# Altium PCB MCU_PCB.PcbDoc
Units mm, origin at the board's own origin, x right, y up, seen from the top; angles counter-clockwise.
Board outline 50.04 x 70 mm, 2 copper layers (Top Layer, Bottom Layer); 8 components, 16 nets, 70 pads, 0 vias.
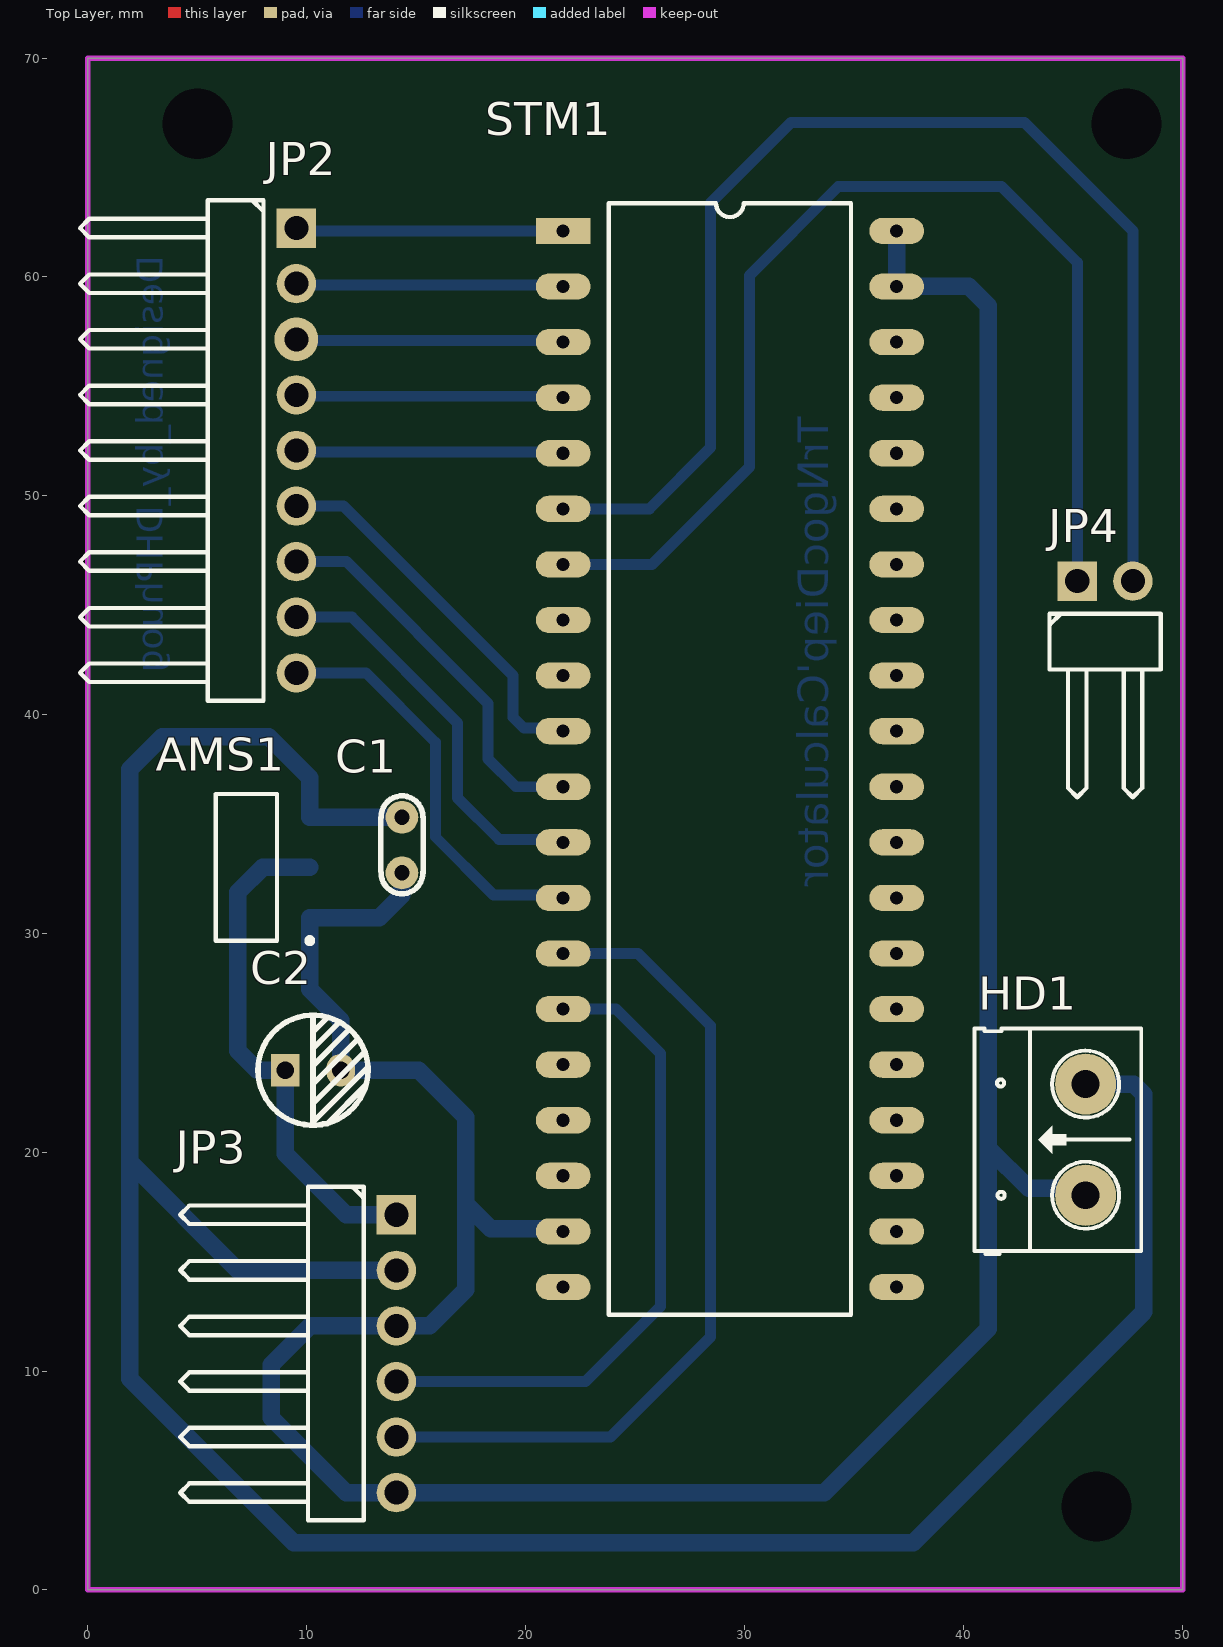
[diagram p0: Top Layer view]
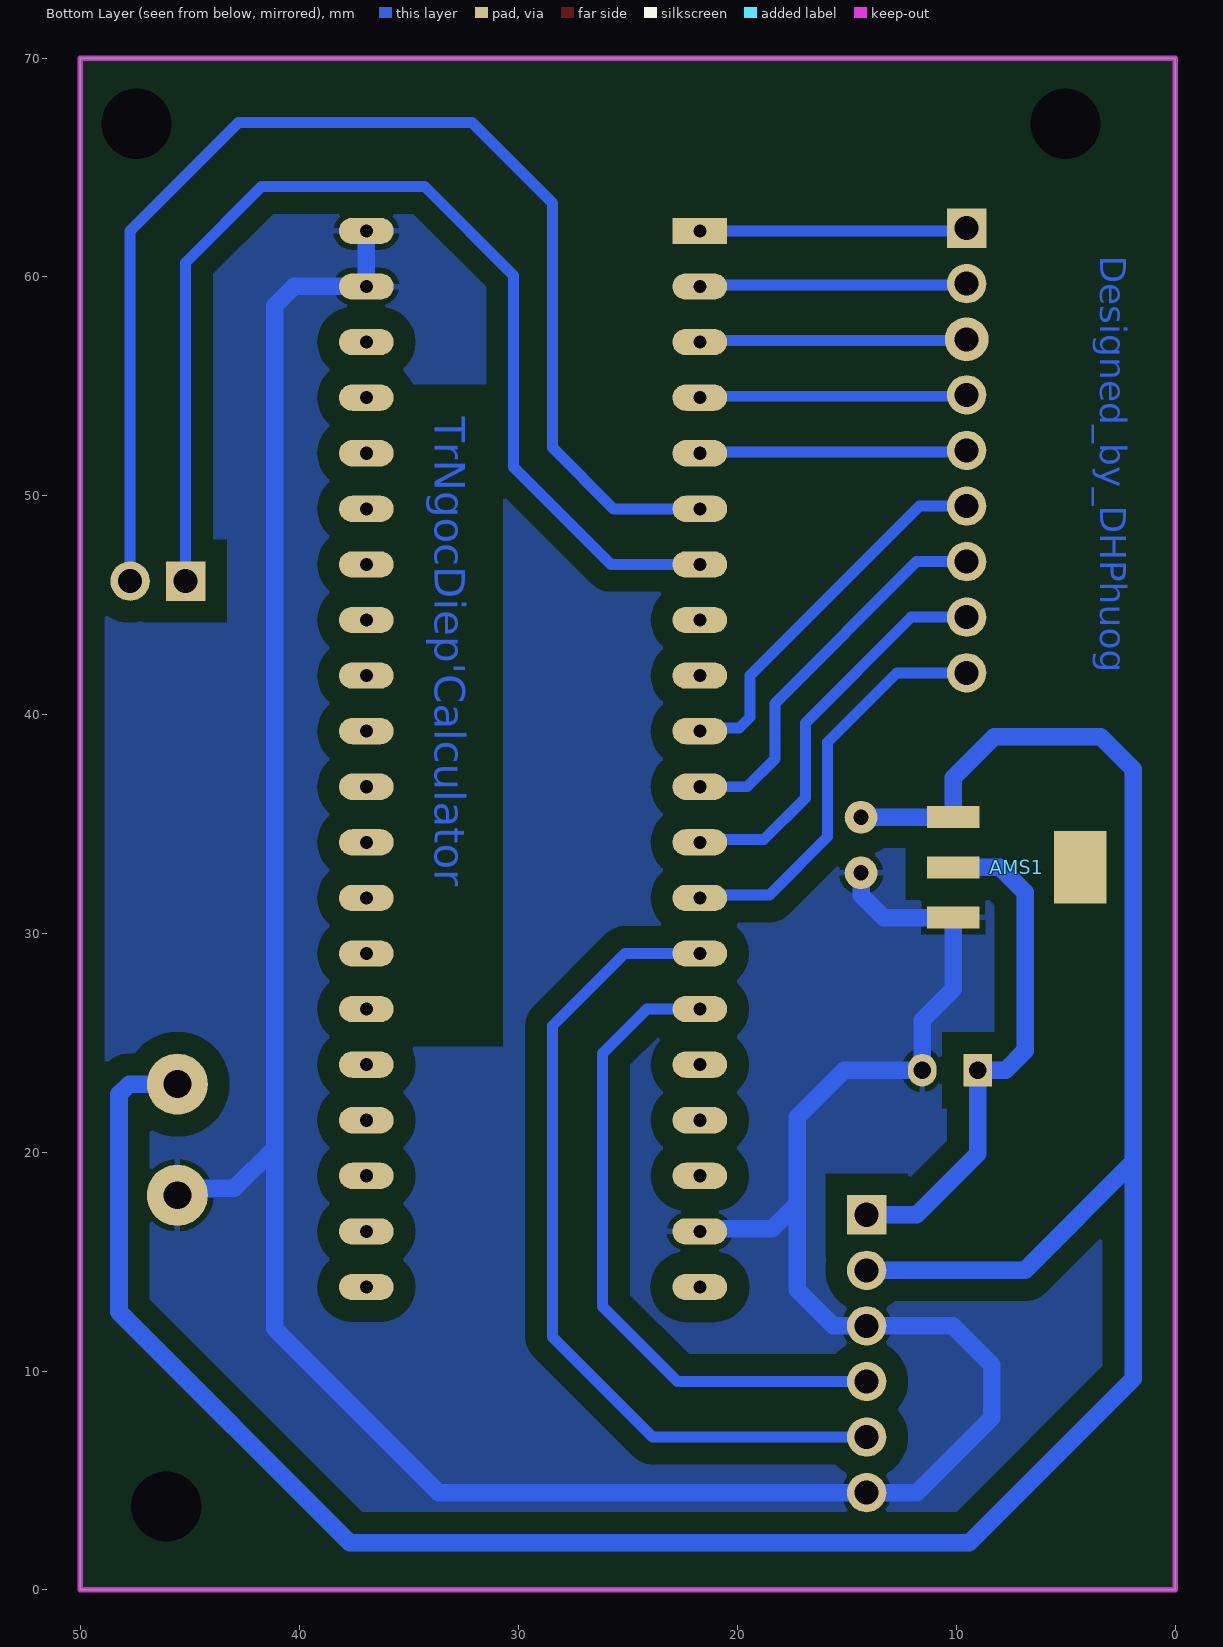
[diagram p1: Bottom Layer view, seen from below]
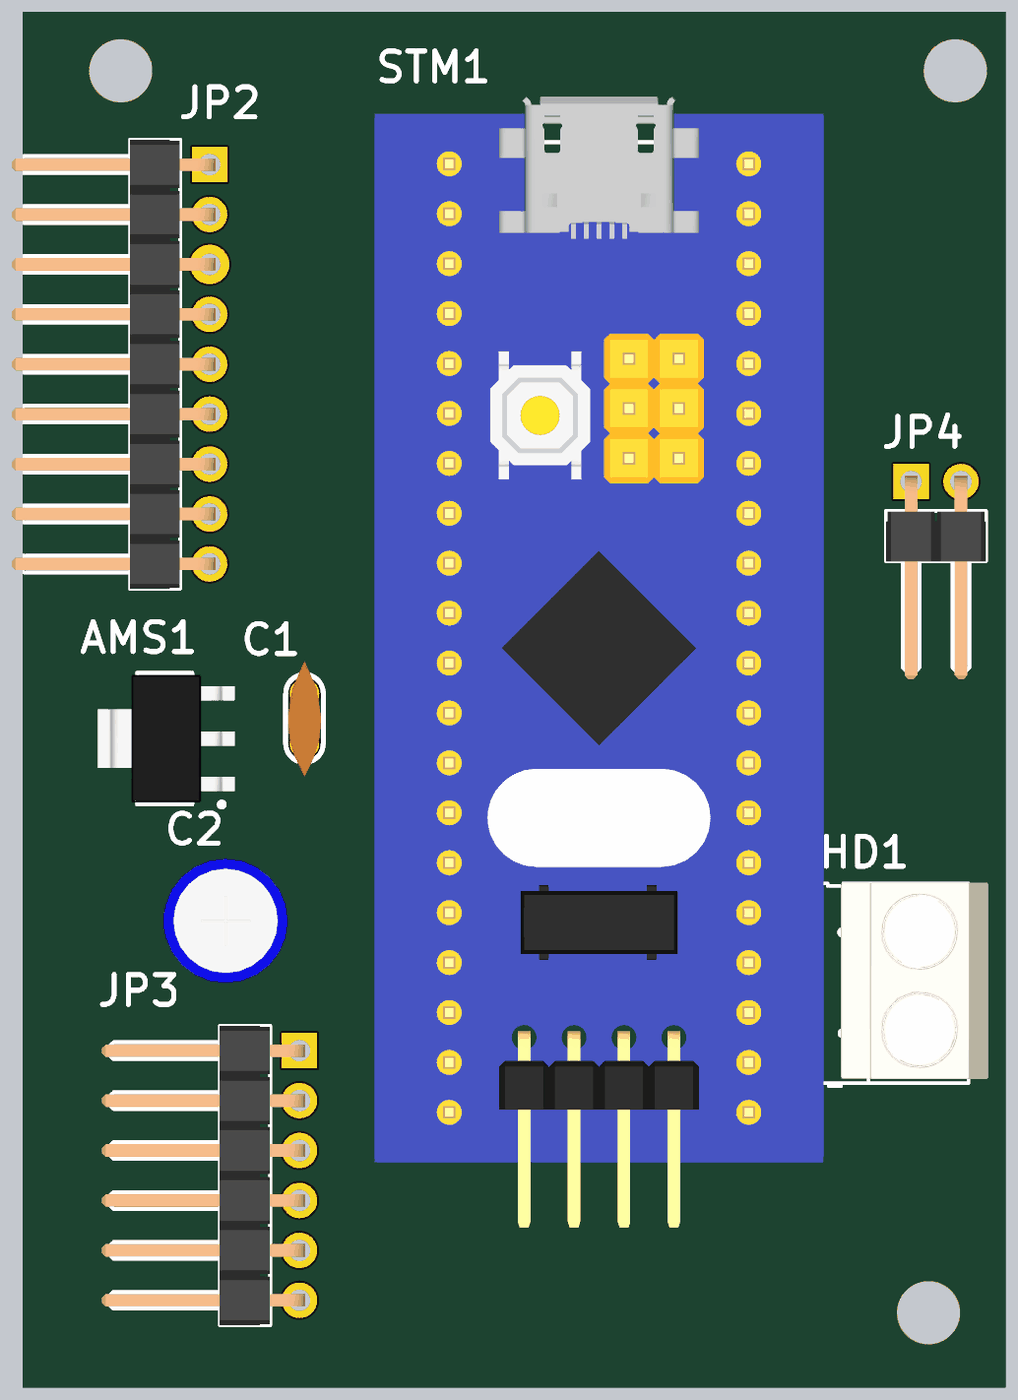
[diagram p2: 3D render of the assembled board from above, using the file's embedded part models]

## Layer stack, top to bottom
Top Solder: solder mask 0.0102, Solder Resist, Dk 3.5
Top Layer: signal copper 0.0356
Dielectric 1: dielectric 0.32, FR-4, Dk 4.8
Bottom Layer: signal copper 0.0356
Bottom Solder: solder mask 0.0102, Solder Resist, Dk 3.5

## Board outline
0,0 50.038,0 50.038,70 0,70

## Design rules (kind name [scope] priority, off if disabled: settings)
Clearance [All] p1: gap=1 ignorepadtopadclearanceinfootprint=FALSE
PolygonConnect [All] p1: connectstyle=Relief reliefconductorwidth=0.254 reliefentries=4 polygonreliefangle="90 Angle" airgapwidth=0.254
RoutingVias [All] p1: holewidth=0.711 width=1.27 viastyle="Through Hole" minholewidth=0.711 minwidth=1.27 maxholewidth=0.711 maxwidth=1.27
SolderMaskExpansion [All] p1: expansion=0.102 istentingtop=FALSE
Width [All] p1: maxlimit=0.8 minlimit=0.3 preferedwidth=0.5
30 further rules are at their usual default settings.

## Components (designator, comment, footprint, x,y, rotation, side; value= is the part's Value field where it differs from the comment)
AMS1 "AMS1117-3.3V" SOT223 7.239,33.02 r90 top value="AMS1117-3.3V SOT223"
C1 "104" "tu gom" 14.351,34.036 r270 top
C2 "100uF" "tu hoa 5mm" 10.287,23.749 r0 top
HD1 "Header 2" HED2 45.593,18.034 r90 top
JP2 "JP 1x9 2.54" "JP 1x9 DC" 6.985,40.64 r270 top
JP3 "JP 1x6 2.54" "JP 1x6 DC" 11.557,3.175 r270 top
JP4 "JP 1x2 2.54" "JP 1x2 DC" 45.212,46.101 r0 top
STM1 "KIT STM32F103C8T6" "STM32F103 KIT" 21.717,62.103 r0 top

## Footprints (in the part's own frame and the unit in brackets; to place one, negate y for a bottom-side part, rotate by r counter-clockwise, add the part's x,y. Pads: shape width x height; smd on the part's side, far side on the other; paste and mask are expansions set on the pad)
HED2 [mil] "Header 2, 2 pin, hight 300mil, Pin to Pin 200, Colour Green"
  round 110 hole 50: 1(0,0) 2(200,0)
  silkscreen extent -106,-100 300,200, body extent -92,-140 302,155, height 394
"JP 1x2 DC" [mm] "JP 1x2 DC"
  rect 1.8x1.8 hole 1.1: 1(0,0)
  round 1.8 hole 1.1: 2(2.54,0)
  silkscreen extent -1.27,-9.88 3.81,-1.5, body extent -1.27,-10.06 3.81,0.3, height 2.55
"JP 1x6 DC" [mm] "6 pins, 1 row, right angled, gold plating"
  rect 1.8x1.8 hole 1.1: 1(-13.97,2.54)
  round 1.8 hole 1.1: 2(-11.43,2.54) 3(-8.89,2.54) 4(-6.35,2.54) 5(-3.81,2.54) 6(-1.27,2.54)
  silkscreen extent -15.24,-7.34 0,1.04, body extent -15.24,-7.52 0,2.84, height 2.54
"JP 1x9 DC" [mm] "9 pins, 1 row, right angled, gold plating"
  rect 1.8x1.8 hole 1.1: 1(-21.59,2.54)
  round 1.8 hole 1.1: 2(-19.05,2.54) 4(-13.97,2.54) 5(-11.43,2.54) 6(-8.89,2.54) 7(-6.35,2.54) 8(-3.81,2.54) 9(-1.27,2.54)
  round 2 hole 1.1: 3(-16.51,2.54)
  silkscreen extent -22.86,-7.34 0,1.04, body extent -22.86,-7.52 0,2.84, height 2.55
SOT223 [mm]
  rect 1x2.4 smd far side: 1(-2.3,-2.9) 2(0,-2.9) 3(2.3,-2.9)
  rect 3.3x2.4 smd far side: 4(0,2.9)
  silkscreen extent -3.47,-3.03 3.35,1.4, body extent -3.25,-3.56 3.25,3.4, height 1.68
"STM32F103 KIT" [mm]
  rect 2.5x1.2 hole 0.6: 1(0,0)
  oval 2.5x1.2 hole 0.6: 2(0,-2.54) 3(0,-5.08) 4(0,-7.62) 5(0,-10.16) 6(0,-12.7) 7(0,-15.24) 8(0,-17.78) 9(0,-20.32) 10(0,-22.86) 11(0,-25.4) 12(0,-27.94) 13(0,-30.48) 14(0,-33.02) 15(0,-35.56) 16(0,-38.1) 17(0,-40.64) 18(0,-43.18) 19(0,-45.72) 20(0,-48.26) 21(15.24,-48.26) 22(15.24,-45.72) 23(15.24,-43.18) 24(15.24,-40.64) 25(15.24,-38.1) 26(15.24,-35.56) 27(15.24,-33.02) 28(15.24,-30.48) 29(15.24,-27.94) 30(15.24,-25.4) 31(15.24,-22.86) 32(15.24,-20.32) 33(15.24,-17.78) 34(15.24,-15.24) 35(15.24,-12.7) 36(15.24,-10.16) 37(15.24,-7.62) 38(15.24,-5.08) 39(15.24,-2.54) 40(15.24,0)
  silkscreen extent 2.08,-49.53 13.16,1.27, body extent -3.81,-53.97 19.05,3.59, height 16.12
"tu gom" [mm] "Tu gom mini"
  round 1.5 hole 0.7: 1(-1.27,0) 2(1.27,0)
  silkscreen extent -2.25,-0.97 2.22,0.97, body extent -2.92,-0.85 2.92,0.85, height 6.12
"tu hoa 5mm" [mm]
  rect 1.3x1.5 hole 0.8: 1(-1.27,0)
  oval 1.3x1.5 hole 0.8: 2(1.27,0)
  silkscreen extent -2.51,-2.51 2.51,2.51, body extent -3.12,-3.18 3.23,3.18, height 14.55

## Part data
AMS1: library part "AMS1117 SMD", "Dán", Chung_Loai=Dán, Don_Vi=Con, Ma_Hang=MH000596
C1: library part "Tu gom 104 50V", "Cắm", Chung_Loai=Cắm, Don_Vi=Con, Ma_Hang=MH004761, So_Chan=2, Ten_Linh_Kien="Tụ gốm 104 100nF 50V"
C2: library part "Tu Hoa 100uF 16V 5x7", "Cắm", Chung_Loai=Cắm, Don_Vi=Con, Ma_Hang=MH001347, So_Chan=2, Ten_Linh_Kien="Tụ Hóa 100uF 16V 5x7MM"
HD1: library part Hed2, "Header 2 (Green)"
JP2: library part "JP 1x9 2.54 Duc Cong", "Cắm", Chung_Loai=Cắm, Don_Vi=Con, Ma_Hang=MH000904, Ten_Linh_Kien="Jump Đơn Đực 2.54MM 1x40P Cong Đứng"
JP3: library part "JP 1x6 2.54 Duc Cong", "Cắm", Chung_Loai=Cắm, Don_Vi=Con, Ma_Hang=MH000904, Ten_Linh_Kien="Jump Đơn Đực 2.54MM 1x40P Cong Đứng"
JP4: library part "JP 1x2 2.54 Duc Cong", "Cắm", Chung_Loai=Cắm, Don_Vi=Con, Ma_Hang=MH000904, Ten_Linh_Kien="Jump Đơn Đực 2.54MM 1x40P Cong Đứng"
STM1: library part "STM32f103 Bluepill", "KIT STM32F103C8T6 Bluepill"

## Free pads (board coordinates)
  round 1.524 hole 3.2: 2(5,67) 2(46.101,3.81) 2(47.465,67)

## Nets (pads, with @x,y where several pads share a name; then routed paths per layer and width w, separated by ;. In a path a pad name is that pad's centre, name@x,y a point inside that pad or via, vN(x,y) a via of type N, cw(c..) or ccw(c..) an arc to the next point about the centre after c; other vN are vias at no path point)
+3.3: AMS1.2 C2.1 JP3.1 | length 23.6
  Bottom Layer w0.8: AMS1.2 8.001,33.02 6.858,31.877 6.858,24.638 7.747,23.749 C2.1 9.017,19.939 11.811,17.145 JP3.1
+5: AMS1.3 C1.1 HD1.2 JP3.2 | length 124.4
  Bottom Layer w0.8: JP3.2 6.858,14.605 1.905,19.558 ; C1.1 14.344,35.313 10.146,35.313 AMS1.3 10.139,37.105 8.255,38.989 3.39,38.989 1.905,37.504 1.905,19.558 ; HD1.2 47.791,23.114 48.26,22.645 48.26,12.7 37.719,2.159 9.398,2.159 1.905,9.652 1.905,19.558
COL1: JP2.1 STM1.1 | length 12.2
  Bottom Layer w0.5: JP2.1 9.652,62.103 STM1.1
COL2: JP2.2 STM1.2 | length 12.2
  Bottom Layer w0.5: JP2.2 9.588,59.627 STM1.2@21.717,59.627
COL3: JP2.3 STM1.3 | length 12.1
  Bottom Layer w0.5: JP2.3@9.588,57.087 STM1.3@21.717,57.087
COL4: JP2.4 STM1.4 | length 12.2
  Bottom Layer w0.5: JP2.4 9.588,54.546 21.653,54.546 STM1.4
COL5: JP2.5 STM1.5 | length 12.2
  Bottom Layer w0.5: JP2.5 9.588,52.006 21.653,52.006 STM1.5
GND: AMS1.1 C1.2 C2.2 HD1.1 JP3.3 JP3.6 STM1.19 STM1.39 STM1.40 | length 141.8
  Bottom Layer w0.8: C1.2 14.351,31.75 13.321,30.72 AMS1.1 10.139,27.453 11.557,26.035 C2.2 15.113,23.749 17.272,21.59 17.272,17.653 ; STM1.19@21.717,16.51 18.415,16.51 17.272,17.653 ; STM1.40 STM1.39 40.259,59.563 41.148,58.674 41.148,20.193 ; HD1.1 45.282,18.345 42.996,18.345 41.148,20.193 ; 17.272,17.653 17.272,13.716 15.621,12.065 JP3.3 10.16,12.065 8.382,10.287 8.382,7.874 11.811,4.445 JP3.6 33.655,4.445 41.148,11.938 41.148,20.193
LCD_SCL: JP3.5 STM1.14 | length 38.6
  Bottom Layer w0.5: JP3.5 23.876,6.985 28.448,11.557 28.448,25.781 25.146,29.083 STM1.14
LCD_SDA: JP3.4 STM1.15 | length 30.3
  Bottom Layer w0.5: JP3.4 22.733,9.525 26.162,12.954 26.162,24.511 24.13,26.543 STM1.15
ROW1: JP2.6 STM1.10 | length 17.6
  Bottom Layer w0.5: JP2.6 11.684,49.53 19.431,41.783 19.431,39.878 19.932,39.377 21.583,39.377 STM1.10
ROW2: JP2.7 STM1.11 | length 18.1
  Bottom Layer w0.5: JP2.7 11.811,46.99 18.288,40.513 18.288,37.973 19.558,36.703 STM1.11 STM1.11@21.59,36.83
ROW3: JP2.8 STM1.12 | length 17.5
  Bottom Layer w0.5: JP2.8 12.065,44.45 16.891,39.624 16.891,36.195 18.796,34.29 STM1.12@20.828,34.29
ROW4: JP2.9 STM1.13 | length 18
  Bottom Layer w0.5: JP2.9 12.7,41.91 15.875,38.735 15.875,34.417 18.542,31.75 STM1.13@20.828,31.75
UART_RX: JP4.1 STM1.7 | length 51.8
  Bottom Layer w0.5: STM1.7 25.781,46.863 30.226,51.308 30.226,60.071 34.29,64.135 41.744,64.135 45.212,60.667 JP4.1
UART_TX: JP4.2 STM1.6 | length 57.9
  Bottom Layer w0.5: STM1.6 25.654,49.403 28.448,52.197 28.448,63.373 32.131,67.056 42.799,67.056 47.752,62.103 JP4.2
pads on no net: AMS1.4 STM1.8 STM1.9 STM1.16 STM1.17 STM1.18 STM1.20 STM1.21 STM1.22 STM1.23 STM1.24 STM1.25 STM1.26 STM1.27 STM1.28 STM1.29 STM1.30 STM1.31 STM1.32 STM1.33 STM1.34 STM1.35 STM1.36 STM1.37 STM1.38

## Polygon pours and split planes (outlines as drawn)
GND on Bottom Layer "GND_L02_P000" (solid, remove dead copper, pour order 0): 0,69.977 50.038,69.977 50.038,0 0,0

## Keep-outs
Keep-Out Layer:
  the board outline again, w0.254

## Other copper
Bottom Layer:
  text "Designed_by_DHPhuog" at 3.418,60.968 h1.2 r90
  text "TrNgocDiep'Calculator" at 33.831,53.602 h1.4 r90